# Altium PCB transmitter_v0_1.PcbDoc
Units mm, origin at the board's own origin, x right, y up, seen from the top; angles counter-clockwise.
Board outline 48.06 x 44.13 mm, 2 copper layers (Top Layer, Bottom Layer); 25 components, 25 nets, 100 pads, 0 vias.
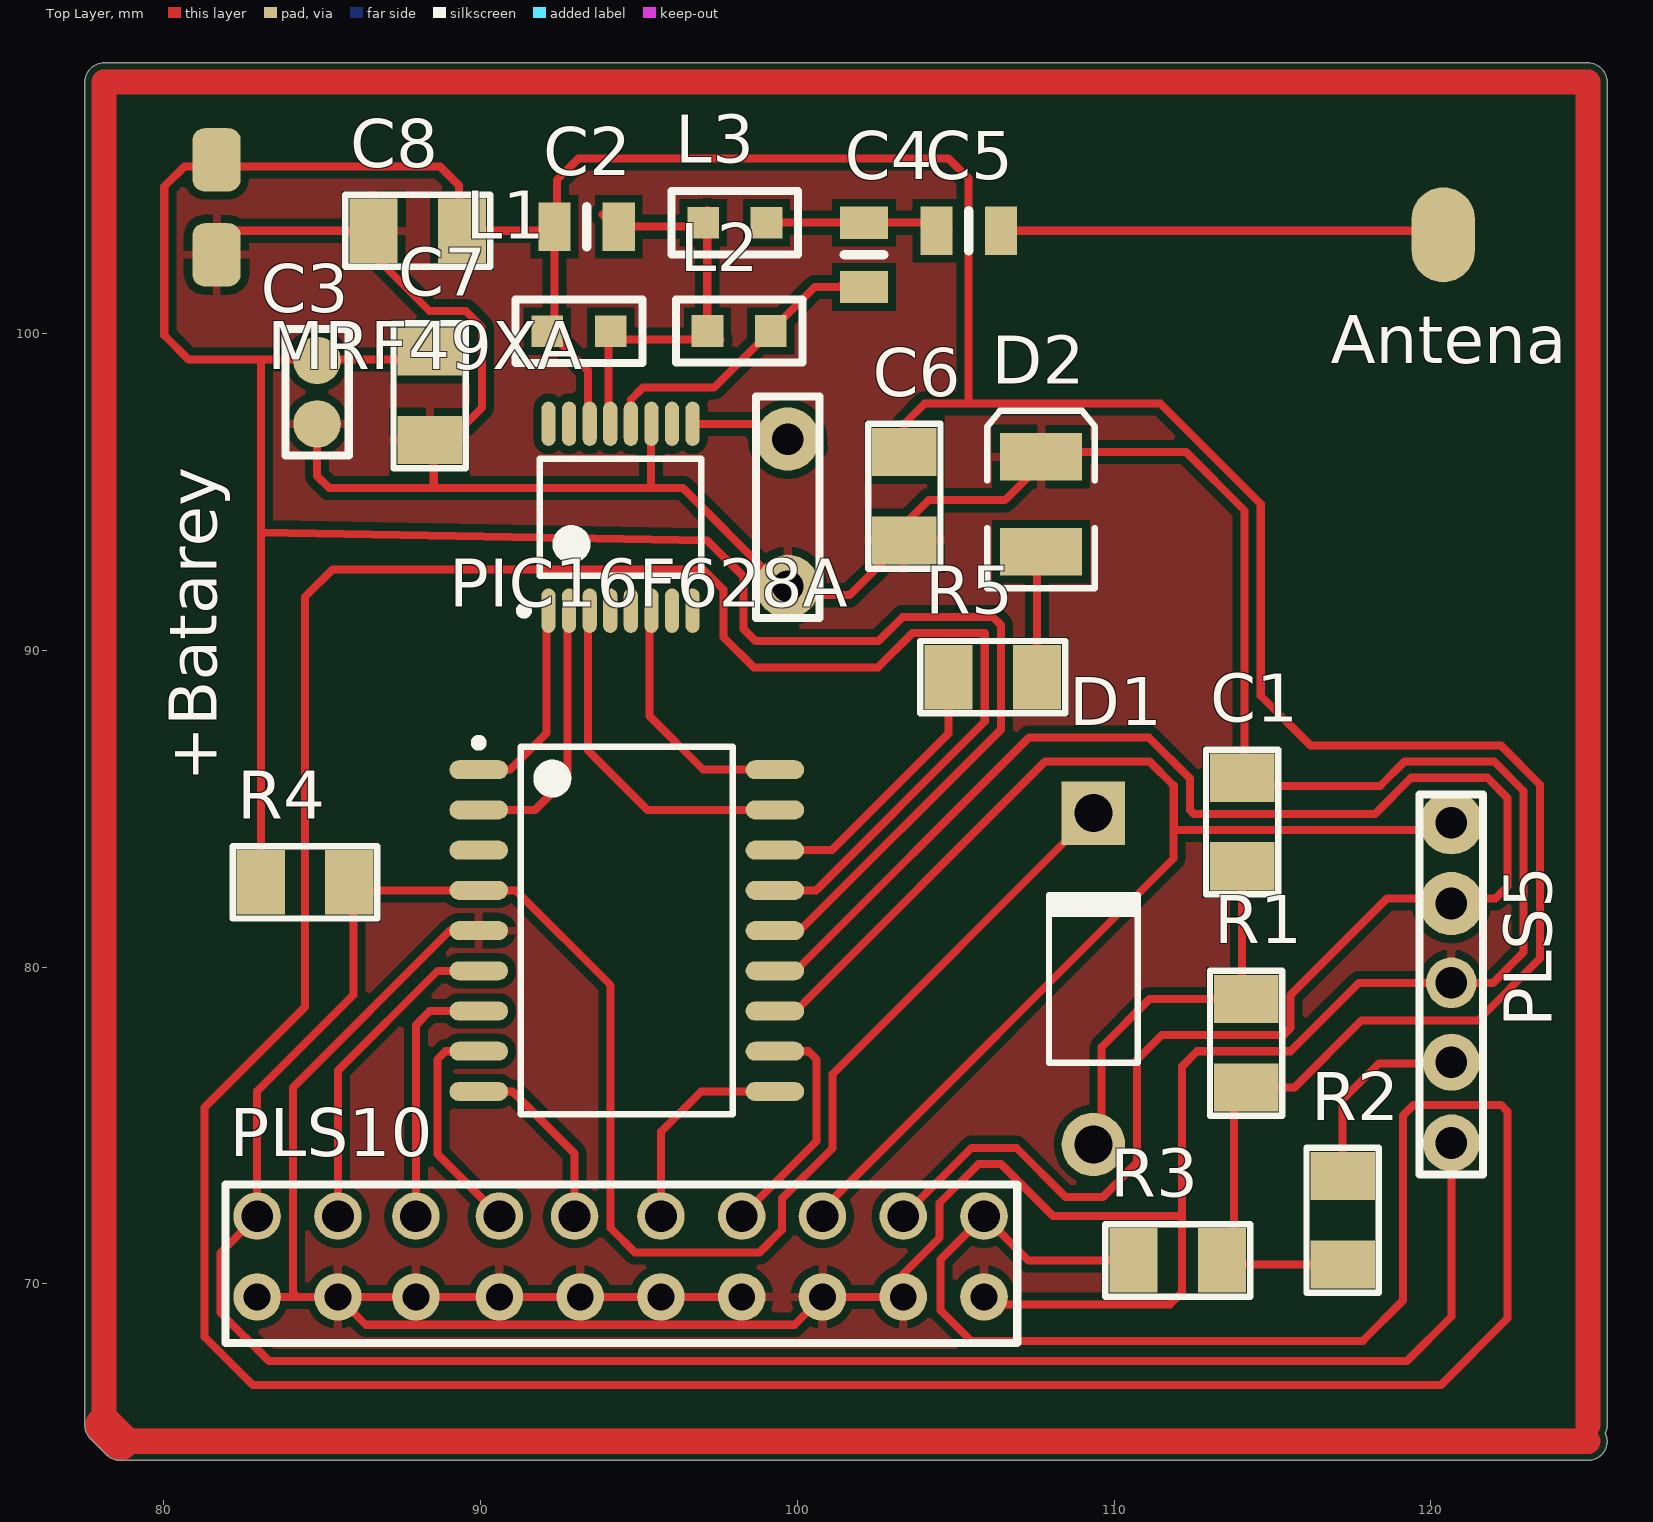
[diagram p0: Top Layer view]
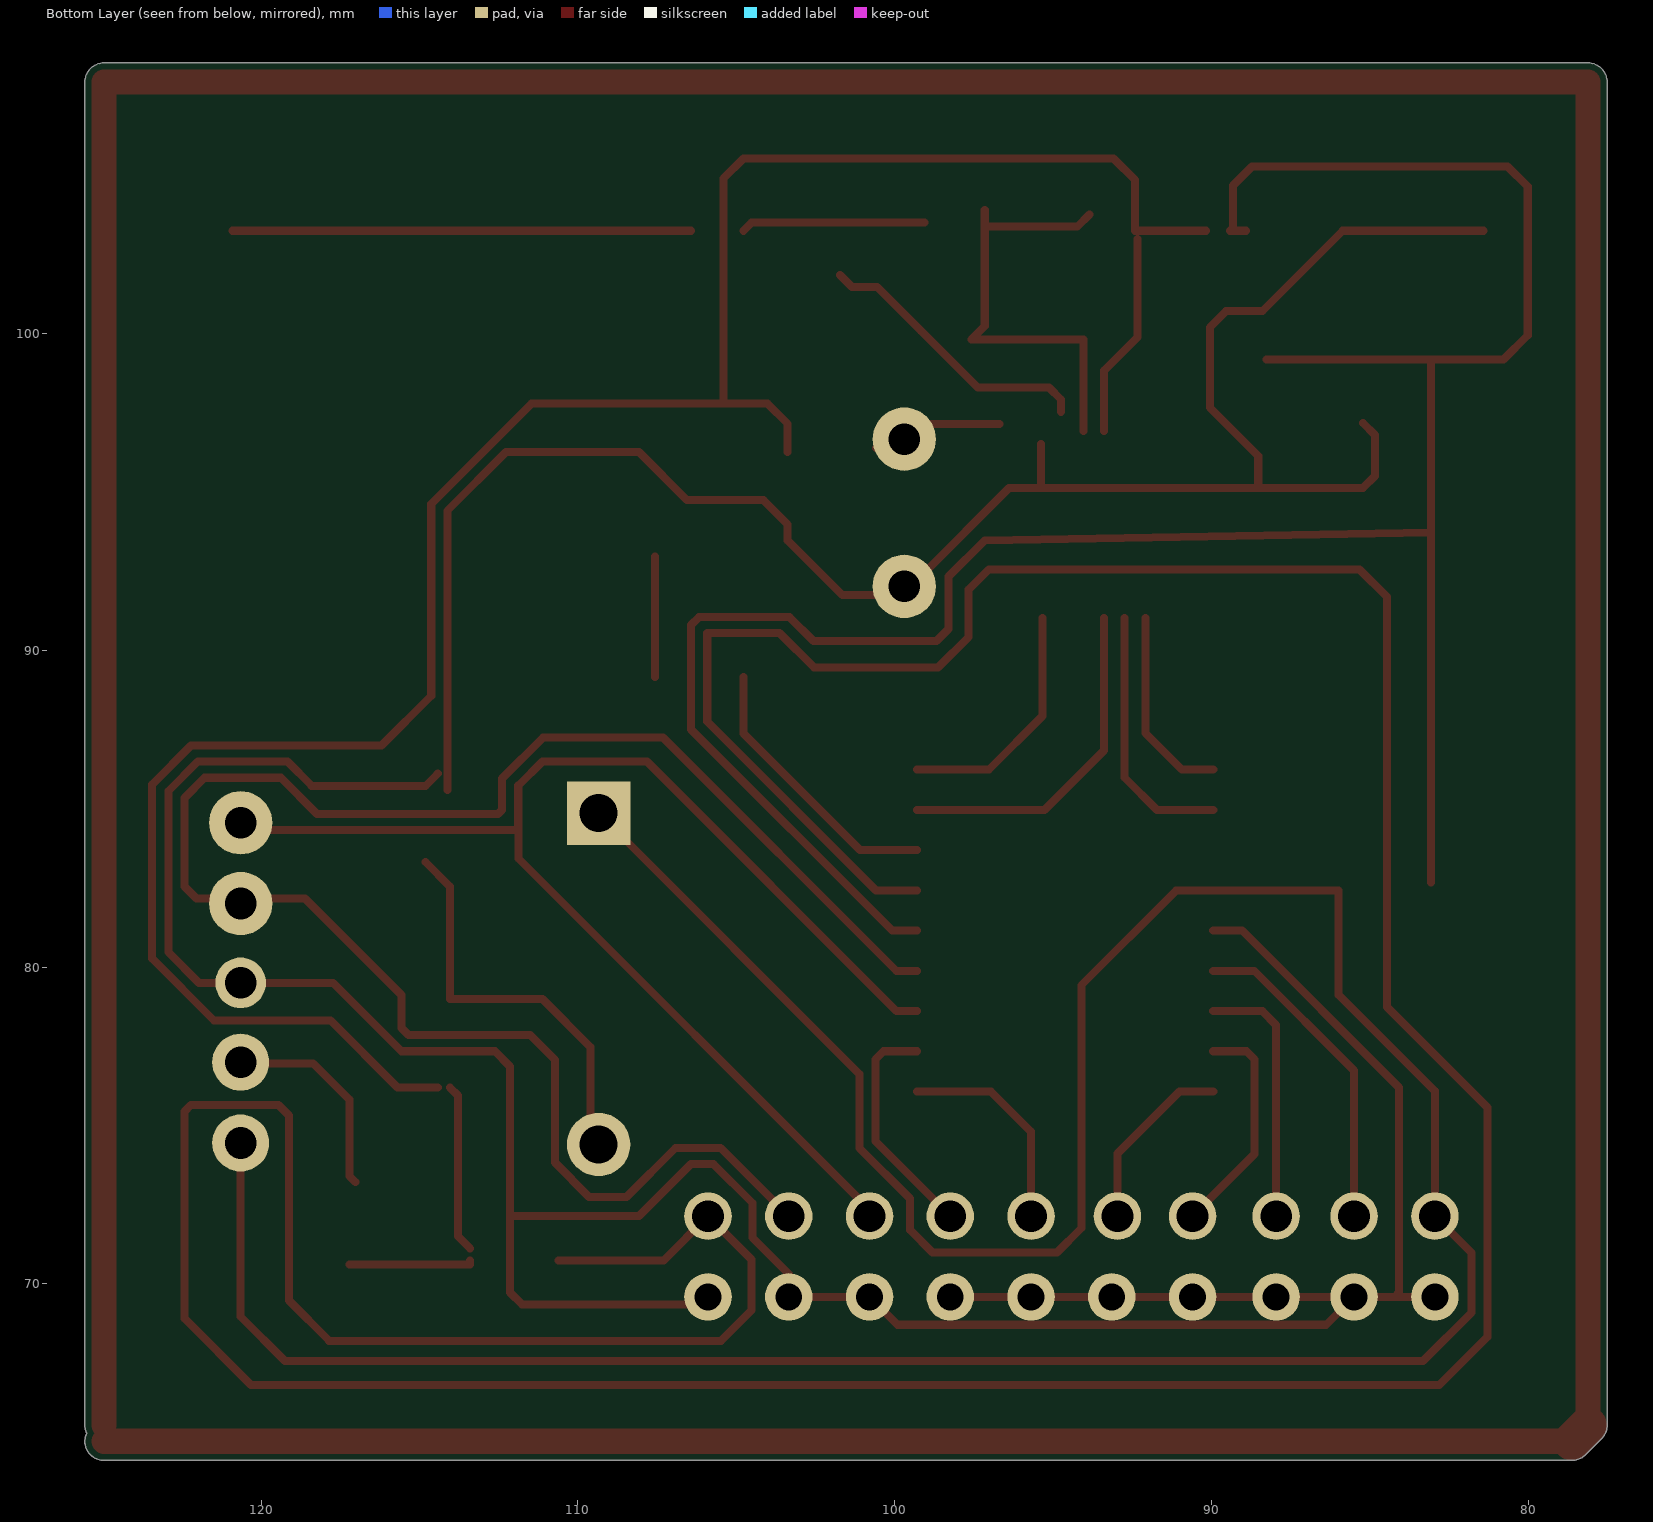
[diagram p1: Bottom Layer view, seen from below]
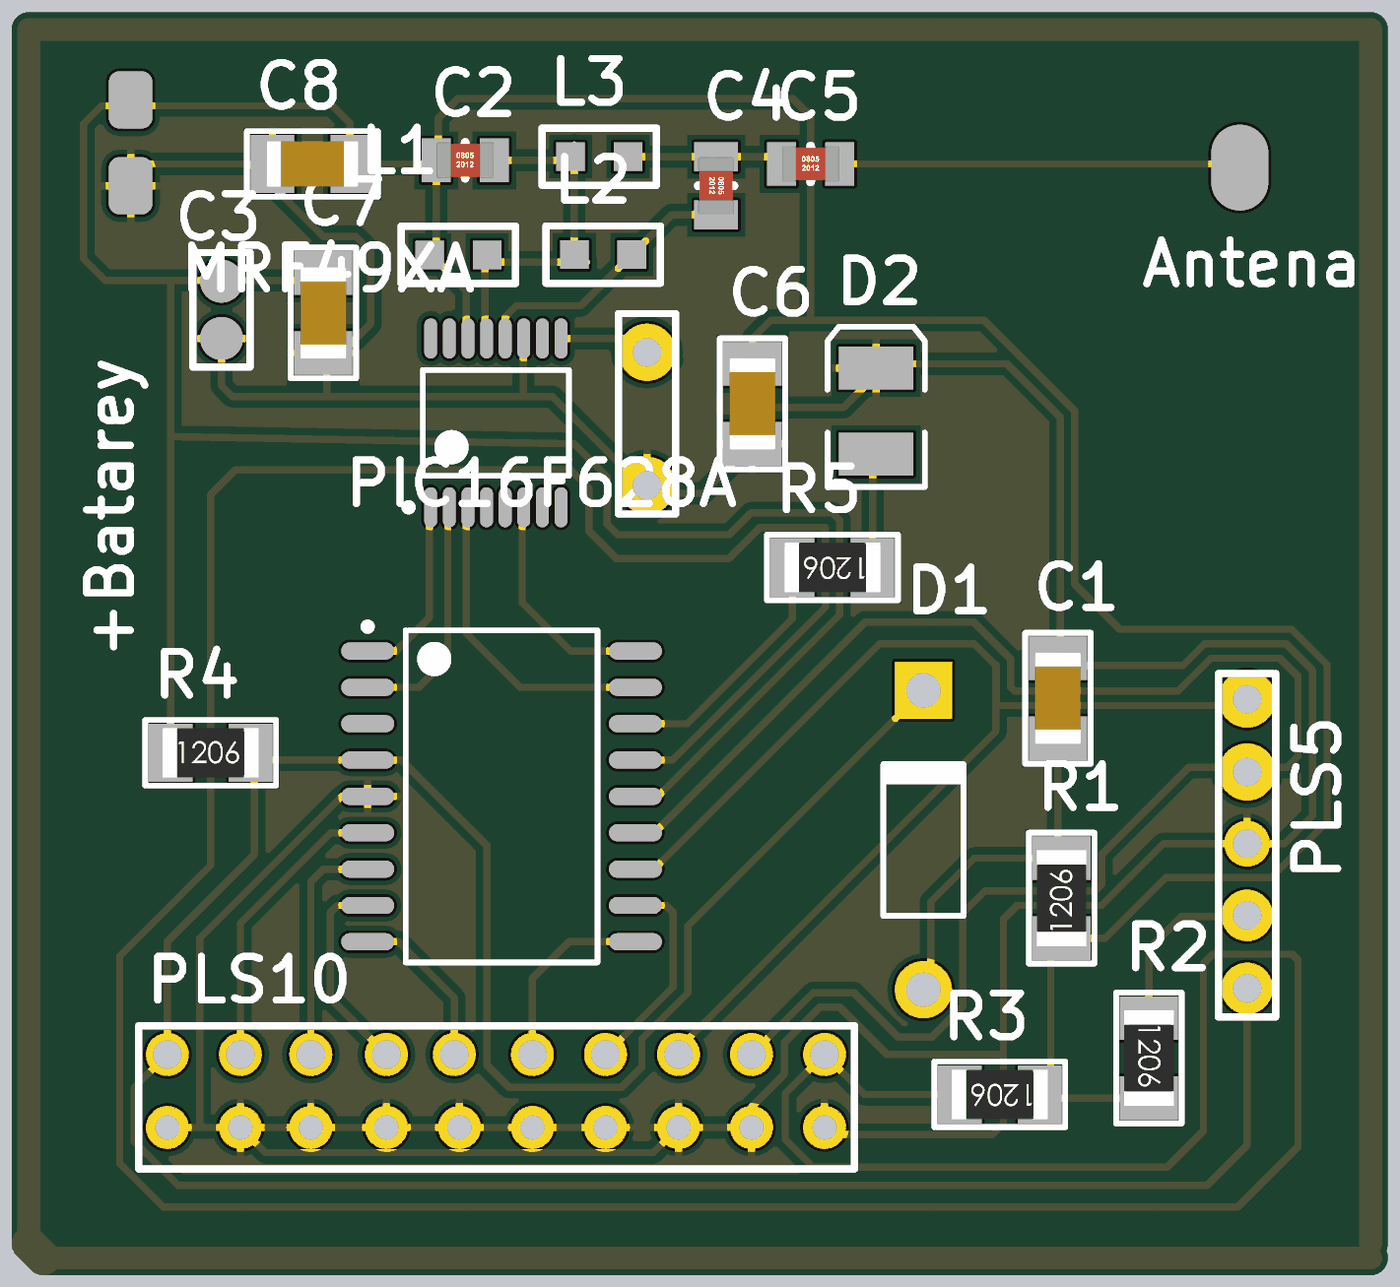
[diagram p2: 3D render of the assembled board from above, using the file's embedded part models]

## Layer stack, top to bottom
Top Solder: solder mask 0.0102, Solder Resist, Dk 3.5
Top Layer: signal copper 0.0356
Dielectric 1: dielectric 0.32, FR-4, Dk 4.8
Bottom Layer: signal copper 0.0356
Bottom Solder: solder mask 0.0102, Solder Resist, Dk 3.5

## Board outline
77.68,65.107 cw(c78.105,65.532) 77.505,65.532 77.505,107.95 cw(c78.105,107.95) 78.105,108.55 124.968,108.55 cw(c124.968,107.95) 125.568,107.95 125.568,65.532 cw(c124.968,65.532) 125.512,65.278 cw(c124.968,65.024) 125.568,65.024 cw(c124.968,65.024) 124.968,64.424 78.613,64.424 cw(c78.613,65.024) 78.188,64.599

## Design rules (kind name [scope] priority, off if disabled: settings)
Clearance [All] p1: gap=0.254
PolygonConnect [All] p1: connectstyle=Relief reliefconductorwidth=0.254 reliefentries=4 polygonreliefangle="90 Angle" airgapwidth=0.254
RoutingLayers [All] p1: top layer_v5=TRUE bottom layer_v5=FALSE
RoutingVias [All] p1: holewidth=0.711 width=1.27 viastyle="Through Hole" minholewidth=0.711 minwidth=1.27 maxholewidth=0.711 maxwidth=1.27
SolderMaskExpansion [All] p1: expansion=0.102
Width [All] p1: maxlimit=0.254 minlimit=0.254 preferedwidth=0.254
29 further rules are at their usual default settings.

## Components (designator, comment, footprint, x,y, rotation, side; value= is the part's Value field where it differs from the comment)
+Batarey "Batarey" Batarey 81.661,102.489 r90 top
Antena "Antena" Anteny 120.396,103.124 r90 top
C1 "100pF" SMD-1206C 114.046,84.582 r0 top
C2 "4.7pF" SMD-0805C 93.345,103.378 r270 top
C3 "" Ñ0805 84.836,97.155 r90 top
C4 "4.7pF" SMD-0805C 102.108,102.489 r180 top
C5 "18pF" SMD-0805C 105.41,103.251 r270 top
C6 "100pF" SMD-1206C 103.378,94.869 r0 top
C7 "100pF" SMD-1206C 88.392,98.044 r0 top
C8 "100pF" SMD-1206C 88.011,103.251 r270 top
D1 "Diode 1N4001" DO-41 109.347,79.629 r90 top
D2 "LED3" 3.5X2.8X1.9 107.696,94.615 r90 top
L1 "" L? 92.107,100.076 r0 top
L2 "" L? 97.163,100.084 r0 top
L3 "" L? 97.028,103.505 r0 top
MRF49XA "MRF49XA" MRF49XA 94.417,94.205 r90 top
PIC16F628A "PIC16F627A" PIC16F627A 94.615,81.153 r0 top
PLS5 "PLS5" PLS5 120.65,74.446 r90 top
PLS10 "PLS10" PLS10 82.944,72.136 r0 top
R1 "10k" SMD-1206-RES 114.173,77.597 r0 top
R2 "10k" SMD-1206-RES 117.221,72.009 r180 top
R3 "10k" SMD-1206-RES 112.014,70.739 r90 top
R4 "10k" SMD-1206-RES 84.455,82.677 r270 top
R5 "10k" SMD-1206-RES 106.172,89.154 r90 top
? "Y1" Quartz 99.695,92.021 r90 top

## Footprints (in the part's own frame and the unit in brackets; to place one, negate y for a bottom-side part, rotate by r counter-clockwise, add the part's x,y. Pads: shape width x height; smd on the part's side, far side on the other; paste and mask are expansions set on the pad)
3.5X2.8X1.9 [mm] "SM LED; 2 C-Bend Leads; Body 3.5 x 2.8 x 1.9 mm, inc leads (LxWxH typ)"
  rect 1.5x2.6 smd: 1(-1.5,0) 2(1.5,0)
  silkscreen extent -2.65,-1.7 2.95,1.7
Anteny [mm]
  oval 3x2 smd: 1(0,0)
Batarey [mm]
  rrect50% 2x1.524 smd: 1(0,0) 2(3,0)
DO-41 [mm] "Diode, Axial; Body 5.2 x 2.7 mm (LxDia. max), Lead Dia. 0.86 mm (max)"
  round 2 hole 1.2: 1(-5.23,0)
  rect 2x2 hole 1.2: 2(5.23,0)
  silkscreen extent -2.65,-1.4 2.75,1.4
L? [mm]
  rect 1x1 smd: 1(0,0) 2(2,0)
  silkscreen extent -1,-1 3,1
MRF49XA [mm]
  oval 1.4x0.45 smd: 1(-2.95,2.275) 2(-2.95,1.625) 3(-2.95,0.975) 4(-2.95,0.325) 5(-2.95,-0.325) 6(-2.95,-0.975) 7(-2.95,-1.625) 8(-2.95,-2.275) 9(2.95,-2.275) 10(2.95,-1.625) 11(2.95,-0.975) 12(2.95,-0.325) 13(2.95,0.325) 14(2.95,0.975) 15(2.95,1.625) 16(2.95,2.275)
  silkscreen extent -3.07,-2.55 1.85,3.17, body extent -2.25,-2.55 2.25,2.55, height 1.2
PIC16F627A [mm]
  oval 1.85x0.6 smd: 1(-4.675,5.08) 2(-4.675,3.81) 3(-4.675,2.54) 4(-4.675,1.27) 5(-4.675,0) 6(-4.675,-1.27) 7(-4.675,-2.54) 8(-4.675,-3.81) 9(-4.675,-5.08) 10(4.675,-5.08) 11(4.675,-3.81) 12(4.675,-2.54) 13(4.675,-1.27) 14(4.675,0) 15(4.675,1.27) 16(4.675,2.54) 17(4.675,3.81) 18(4.675,5.08)
  silkscreen extent -4.8,-5.8 3.35,6.05, body extent -3.75,-5.8 3.75,5.8, height 2.05
PLS5 [mm]
  round 1.8 hole 1: 1(0,0) 2(2.55,0)
  round 1.6 hole 1: 3(5.056,0)
  round 2 hole 1: 4(7.56,0) 5(10.11,0)
  silkscreen extent -1,-1 11,1
PLS10 [mm]
  round 1.5 hole 1: 1(0,0) 2(2.55,0) 3(5.01,0) 4(7.65,0) 5(10.02,0) 6(12.75,0) 7(15.3,0) 8(17.85,0) 9(20.4,0) 10(22.95,0)
  round 1.5 hole 0.85: 11(0,-2.55) 12(2.55,-2.55) 13(5.01,-2.55) 14(7.65,-2.55) 15(10.2,-2.55) 16(12.75,-2.55) 17(15.3,-2.55) 18(17.85,-2.55) 19(20.4,-2.55) 20(22.95,-2.55)
  silkscreen extent -1,-4 24,1
Quartz [mm]
  round 2 hole 1: 1(0,0) 2(4.65,0)
  silkscreen extent -1,-1 6,1
SMD-0805C [mil]
  rect 60x40 smd: 1(0,40) 2(0,-40)
  silkscreen extent -25,0 25,0, body extent -25,-39 25,39, height 35
SMD-1206-RES [mil]
  rect 80x60 smd: 1(0,55) 2(0,-55)
  silkscreen extent -45,-90 45,90, body extent -34,-66 34,66, height 33
SMD-1206C [mil]
  rect 80x60 smd: 1(0,55) 2(0,-55)
  silkscreen extent -45,-90 45,90, body extent -31,-63 32,63, height 39
Ñ0805 [mm]
  round 1.5 smd: 1(0,0) 2(2,0)
  silkscreen extent -1,-1 3,1

## Part data
C1 C6 C7 C8: library part GCM31A7U2J101JX01D, "CAP CER 100PF 630V U2J 1206"
C2 C4: library part GQM2195C2A4R7BB01D, "CAP CER 4.7PF 100V NP0 0805"
C3: library part Capacity
C5: library part GQM2195C2A180JB01D, "CAP CER 18PF 100V NP0 0805"
D1: "1 Amp General Purpose Rectifier"
D2: "Typical BLUE SiC LED"
L1 L2 L3: library part Inductance
R1 R2 R3 R4 R5: library part ERJ-P08J103V, "RES SMD 10K OHM 5% 2/3W 1206"
?: library part Quartz

## Nets (pads, with @x,y where several pads share a name; then routed paths per layer and width w, separated by ;. In a path a pad name is that pad's centre, name@x,y a point inside that pad or via, vN(x,y) a via of type N, cw(c..) or ccw(c..) an arc to the next point about the centre after c; other vN are vias at no path point)
CS: MRF49XA.3 PIC16F628A.17 | length 10.9
  Top Layer w0.254: MRF49XA.3@93.386,91.03 93.386,86.843 95.266,84.963 PIC16F628A.17
FSK/DATA/FSEL: MRF49XA.6 PIC16F628A.18 | length 7.8
  Top Layer w0.254: MRF49XA.6@95.336,91.03 95.336,87.925 97.028,86.233 PIC16F628A.18
GND: +Batarey.1 ?.1 C1.1 C3.1 C6.2 C7.2 C8.2 D2.2 MRF49XA.11 PIC16F628A.5 PLS5.3 PLS10.11 PLS10.12 PLS10.13 PLS10.14 PLS10.15 PLS10.16 PLS10.17 PLS10.18 PLS10.19 PLS10.20 | length 162.9
  Top Layer w0.254: +Batarey.1@81.407,103.251 85.852,103.251 88.392,100.711 89.535,100.711 90.043,100.203 90.043,97.663 88.519,96.139 88.519,95.123 ; PLS10.11 84.211,69.586 ; C3.1@85.217,97.187 84.836,96.806 84.836,95.504 85.217,95.123 88.519,95.123 ; PIC16F628A.5 89.027,81.153 84.074,76.2 84.074,72.605 84.075,72.604 84.075,69.722 84.211,69.586 ; MRF49XA.11@95.377,96.52 95.377,95.123 ; PLS10.17 PLS10.16 PLS10.15 PLS10.14 PLS10.13 PLS10.12 ; PLS10.20 106.138,69.342 111.76,69.342 112.141,69.723 112.141,72.136 ; C1.1@114.125,85.598 114.125,94.409 112.268,96.266 108.077,96.266 106.553,94.742 104.14,94.742 103.378,93.98 C6.2 101.649,91.743 99.162,91.743 99.162,92.354 96.393,95.123 95.377,95.123 ; C1.1@114.427,86.106 114.808,85.725 118.408,85.725 119.17,86.487 122.003,86.487 122.936,85.554 122.936,80.477 121.961,79.502 PLS5.3 117.729,79.502 115.57,77.343 112.618,77.343 112.141,76.866 112.141,72.136 ; 84.211,69.586 PLS10.12 ; PLS10.12 86.373,68.707 99.915,68.707 PLS10.18 PLS10.19 103.344,70.307 104.496,71.459 104.496,72.557 105.726,73.787 106.426,73.787 108.077,72.136 112.141,72.136 ; 88.519,95.123 95.377,95.123
"MCLR VPP": D1.2 PIC16F628A.4 PLS5.1 PLS10.1 R4.1 | length 100.6
  Top Layer w0.254: D1.2@109.093,84.605 101.117,76.629 101.117,74.291 99.517,72.691 99.517,71.704 98.806,70.993 94.869,70.993 94.107,71.755 94.107,79.426 91.11,82.423 PIC16F628A.4 85.979,82.423 85.979,79.121 82.944,76.086 PLS10.1 81.788,70.98 81.788,69.088 83.312,67.564 119.253,67.564 120.65,68.961 PLS5.1 PLS5.1@120.65,74.492
Net_2: ?.2 MRF49XA.9 | length 4.1
  Top Layer w0.254: MRF49XA.9 99.211,97.155 ?.2 99.936,96.595 ?.2@100.584,96.393
NetAntena_1: Antena.1 C5.1 | length 14.5
  Top Layer w0.254: C5.1 Antena.1@120.904,103.251
NetC1_2: C1.2 D1.1 R1.1 | length 12.6
  Top Layer w0.254: D1.1@109.907,74.728 109.601,75.034 109.601,77.47 111.125,78.994 114.046,78.994 114.046,82.55 C1.2@114.808,83.312
NetC2_1: C2.1 L1.2 L2.1 L3.1 MRF49XA.13 | length 14.2
  Top Layer w0.254: C2.1@93.853,103.759 94.234,103.378 C2.1 L3.1@97.155,103.378 ; MRF49XA.13@94.036,96.93 94.036,99.822 97.58,99.822 97.155,100.247 L3.1@97.155,103.378 ; L3.1@97.155,103.911 L3.1@97.155,103.378
NetC4_1: C4.1 L2.2 MRF49XA.12 | length 9
  Top Layer w0.254: MRF49XA.12@94.742,97.536 94.742,97.917 95.123,98.298 97.377,98.298 L2.2 100.552,101.473 101.346,101.473 C4.1@101.727,101.854
NetC4_2: C4.2 C5.2 L3.2 | length 5.8
  Top Layer w0.254: L3.2@99.06,103.505 C4.2 104.521,103.505 C5.2@104.775,103.251
NetD2_1: D2.1 R5.2 | length 3.8
  Top Layer w0.254: R5.2 D2.1@107.569,92.964
NetPIC16F628A_15: PIC16F628A.15 PLS10.10 R3.1 | length 143.7
  Top Layer w0.254: PIC16F628A.15 100.584,82.423 105.918,87.757 105.918,90.551 103.632,90.551 102.54,89.459 98.628,89.459 97.663,90.424 97.663,91.923 97.028,92.558 85.319,92.558 84.455,91.694 84.455,78.74 81.28,75.565 81.28,68.326 82.804,66.802 120.32,66.802 122.428,68.91 122.428,75.438 122.225,75.641 119.456,75.641 119.126,75.311 119.126,69.469 117.856,68.199 105.486,68.199 104.521,69.164 104.521,70.763 PLS10.10 107.291,70.739 R3.1
NetPIC16F628A_16: PIC16F628A.16 R5.1 | length 8.8
  Top Layer w0.254: PIC16F628A.16 101.092,83.693 104.775,87.376 R5.1
NetPLS5_2: PLS5.2 R2.2 | length 6.7
  Top Layer w0.254: R2.2@117.03,73.215 R2.2 117.221,75.819 118.364,76.962 120.371,76.962 PLS5.2@120.65,76.683
RB0/INT: PIC16F628A.6 PLS10.2 | length 10.3
  Top Layer w0.254: PLS10.2 85.494,76.731 88.646,79.883 PIC16F628A.6
RB1/RX/DT: PIC16F628A.7 PLS10.3 | length 8.2
  Top Layer w0.254: PLS10.3 87.954,78.175 88.392,78.613 PIC16F628A.7
RB2/TC/CK: PIC16F628A.8 PLS10.4 | length 7.2
  Top Layer w0.254: PIC16F628A.8 88.888,77.343 88.634,77.089 88.634,74.096 PLS10.4
RB3/CCP1: PIC16F628A.9 PLS10.5 | length 5.8
  Top Layer w0.254: PIC16F628A.9 91.008,76.073 92.964,74.117 PLS10.5
RB4/PGM: PIC16F628A.10 PLS10.6 | length 6.8
  Top Layer w0.254: PLS10.6 95.694,74.803 96.964,76.073 PIC16F628A.10
RB5: PIC16F628A.11 PLS10.7 | length 7.4
  Top Layer w0.254: PLS10.7 100.609,74.501 100.609,77.089 100.355,77.343 PIC16F628A.11
RB6/T1OSO/T1CKI/PGC: PIC16F628A.12 PLS5.5 PLS10.8 | length 44.8
  Top Layer w0.254: PIC16F628A.12 99.949,78.613 107.823,86.487 111.125,86.487 111.871,85.741 111.871,83.423 100.794,72.346 PLS10.8 ; 111.887,85.741 111.887,84.328 PLS5.5@120.904,84.328
RB7/T1OSI/PGD: PIC16F628A.13 PLS5.4 PLS10.9 | length 58.5
  Top Layer w0.254: PIC16F628A.13 99.949,79.883 107.315,87.249 111.097,87.249 112.395,85.951 112.395,84.963 112.522,84.836 118.237,84.836 119.38,85.979 121.793,85.979 122.428,85.344 122.428,82.55 122.047,82.169 118.618,82.169 115.57,79.121 115.57,78.074 115.347,77.851 111.506,77.851 110.728,77.073 110.728,73.827 109.647,72.746 108.462,72.746 106.913,74.295 105.503,74.295 PLS10.9
SCK: MRF49XA.2 PIC16F628A.2 | length 8.3
  Top Layer w0.254: PIC16F628A.2 91.719,84.963 92.736,85.98 MRF49XA.2@92.736,91.03
SDI: MRF49XA.1 PIC16F628A.1 | length 6.3
  Top Layer w0.254: PIC16F628A.1 90.932,86.233 92.086,87.387 MRF49XA.1@92.086,91.03
VDD: +Batarey.2 C2.2 C3.2 C6.1 C7.1 C8.1 L1.1 MRF49XA.14 PIC16F628A.14 R1.2 R2.1 R3.2 R4.2 | length 166.9
  Top Layer w0.254: R4.2 83.058,93.726 ; C7.1@88.265,99.187 83.058,99.187 ; C8.1@88.9,103.251 C8.1 89.316,103.343 89.316,104.683 88.716,105.283 80.645,105.283 80.01,104.648 80.01,99.949 80.772,99.187 83.058,99.187 ; 90.17,103.251 92.405,103.251 92.405,104.851 93.091,105.537 104.775,105.537 105.41,104.902 105.41,97.79 ; C2.2@92.329,102.997 92.329,99.888 93.386,98.831 MRF49XA.14@93.386,96.93 ; PIC16F628A.14 100.076,81.153 106.426,87.503 106.426,90.805 106.172,91.059 103.327,91.059 102.565,90.297 98.679,90.297 98.298,90.678 98.298,92.329 97.155,93.472 83.058,93.726 ; C6.1 103.378,97.155 104.013,97.79 105.41,97.79 ; R3.2 113.411,70.612 R2.1 ; R3.2@113.411,71.12 113.792,71.501 113.792,75.946 R1.2@114.046,76.2 ; R1.2@114.427,76.2 115.697,76.2 117.818,78.321 121.498,78.321 123.444,80.267 123.444,85.765 122.214,86.995 116.205,86.995 114.633,88.567 114.633,94.619 111.462,97.79 105.41,97.79 ; 83.058,93.726 83.058,99.187
pads on no net: MRF49XA.4 MRF49XA.5 MRF49XA.7 MRF49XA.8 MRF49XA.10 MRF49XA.15 MRF49XA.16 PIC16F628A.3
copper on no net: | length 178.8
  Top Layer w0.8: 78.105,65.532 78.105,107.95 119.888,107.95 124.968,107.95 124.968,75.946 124.968,65.532 ; 78.613,65.024 124.968,65.024
  Top Layer w1.2: 78.105,65.532 78.613,65.024

## Polygon pours and split planes (outlines as drawn)
GND on Top Layer "Mechanical 1-GND" (solid, remove dead copper, pour order 10): 124.841,108.331 124.841,65.151 124.968,65.024 124.841,64.897 78.232,64.897 78.232,107.696 78.105,107.823